# Altium PCB NewPowerandPlacePCB.PcbDoc
Units mm, origin at the board's own origin, x right, y up, seen from the top; angles counter-clockwise.
Board outline 89 x 123.55 mm, 4 copper layers (Top Layer, Internal Plane 1, Internal Plane 2, Bottom Layer); 78 components, 72 nets, 288 pads, 12 vias.
Unrouted connection lines stored in the file: 3.
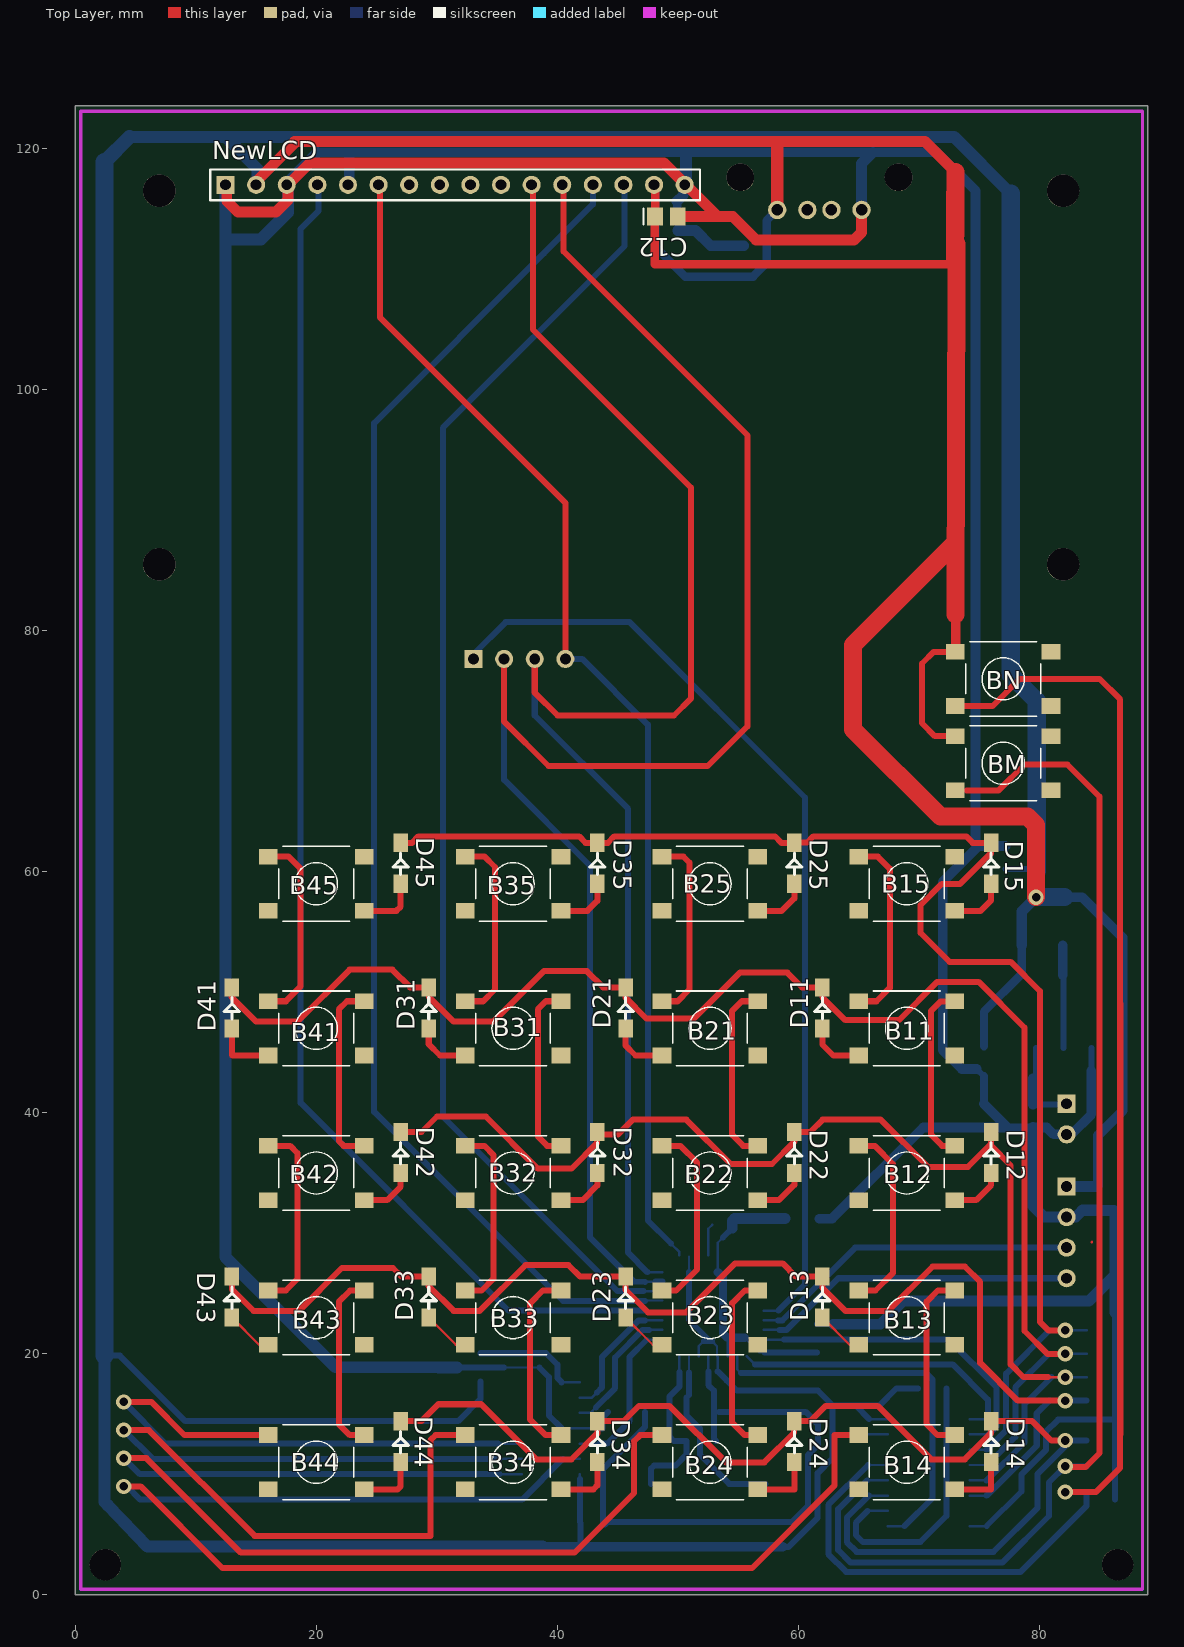
[diagram p0: Top Layer view]
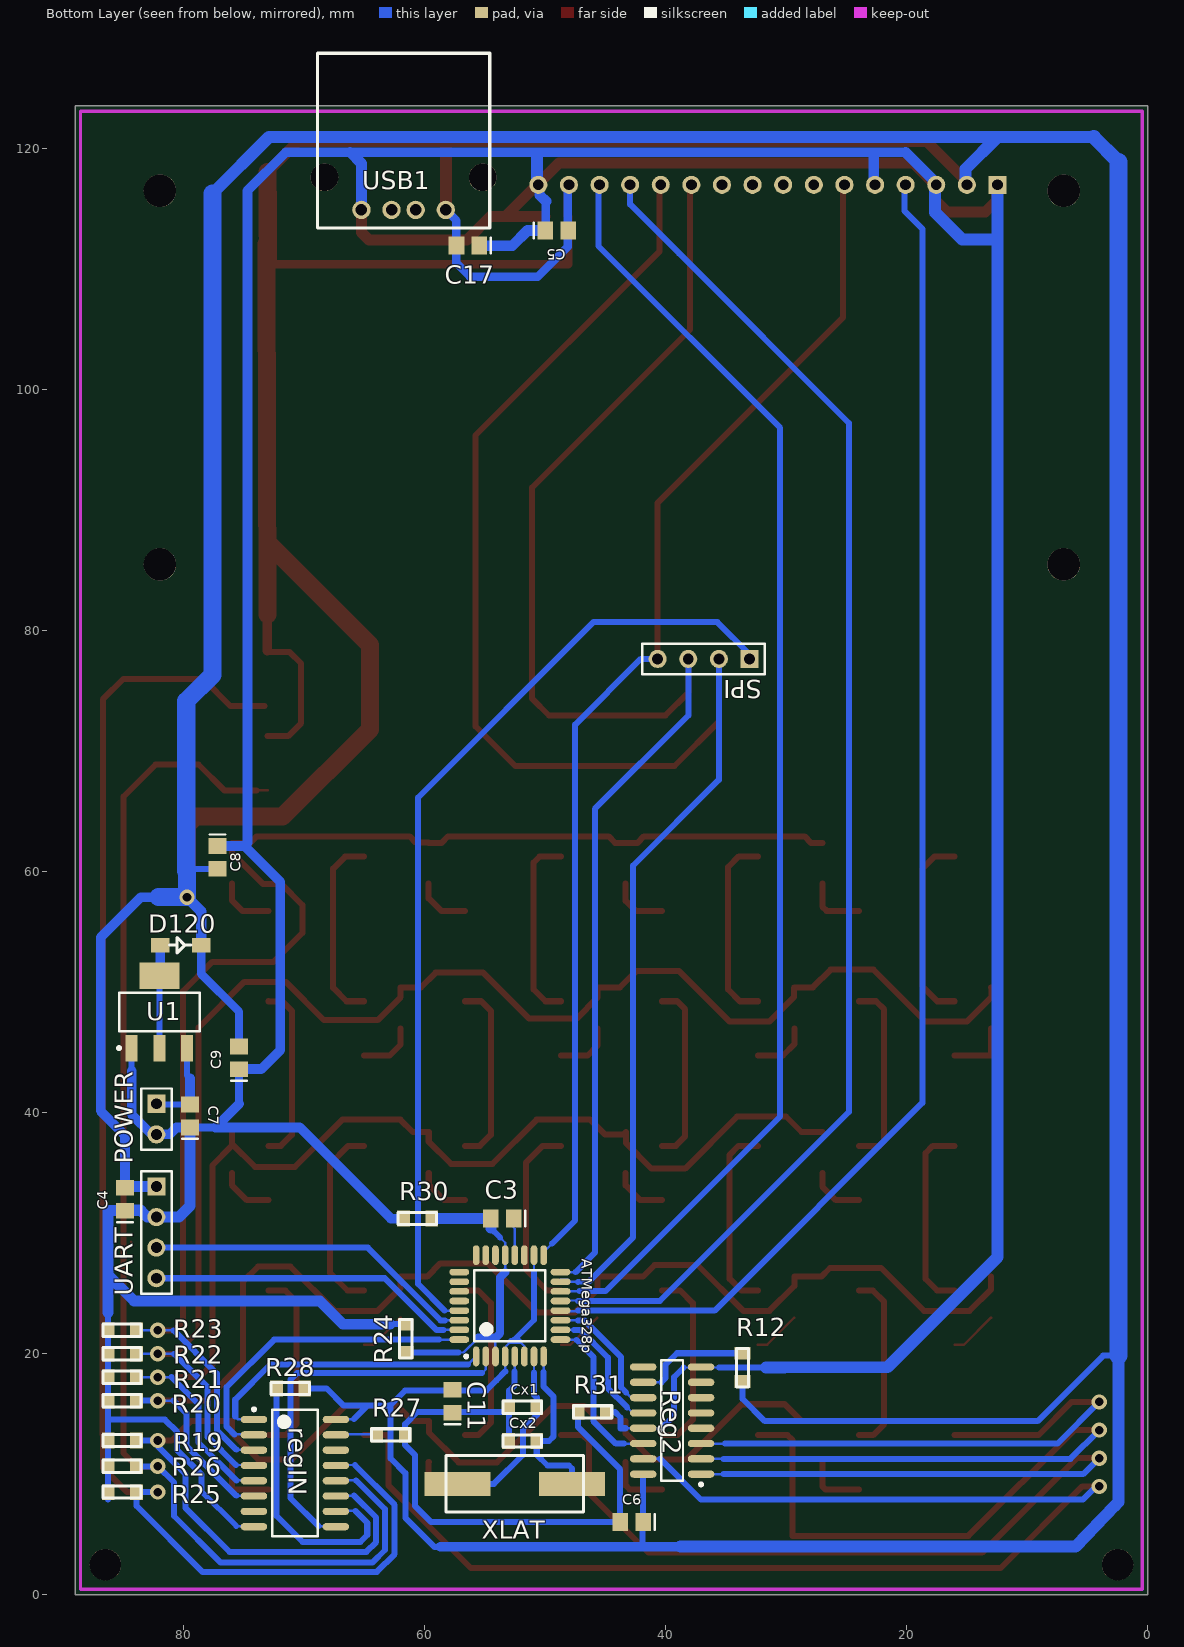
[diagram p1: Bottom Layer view, seen from below]
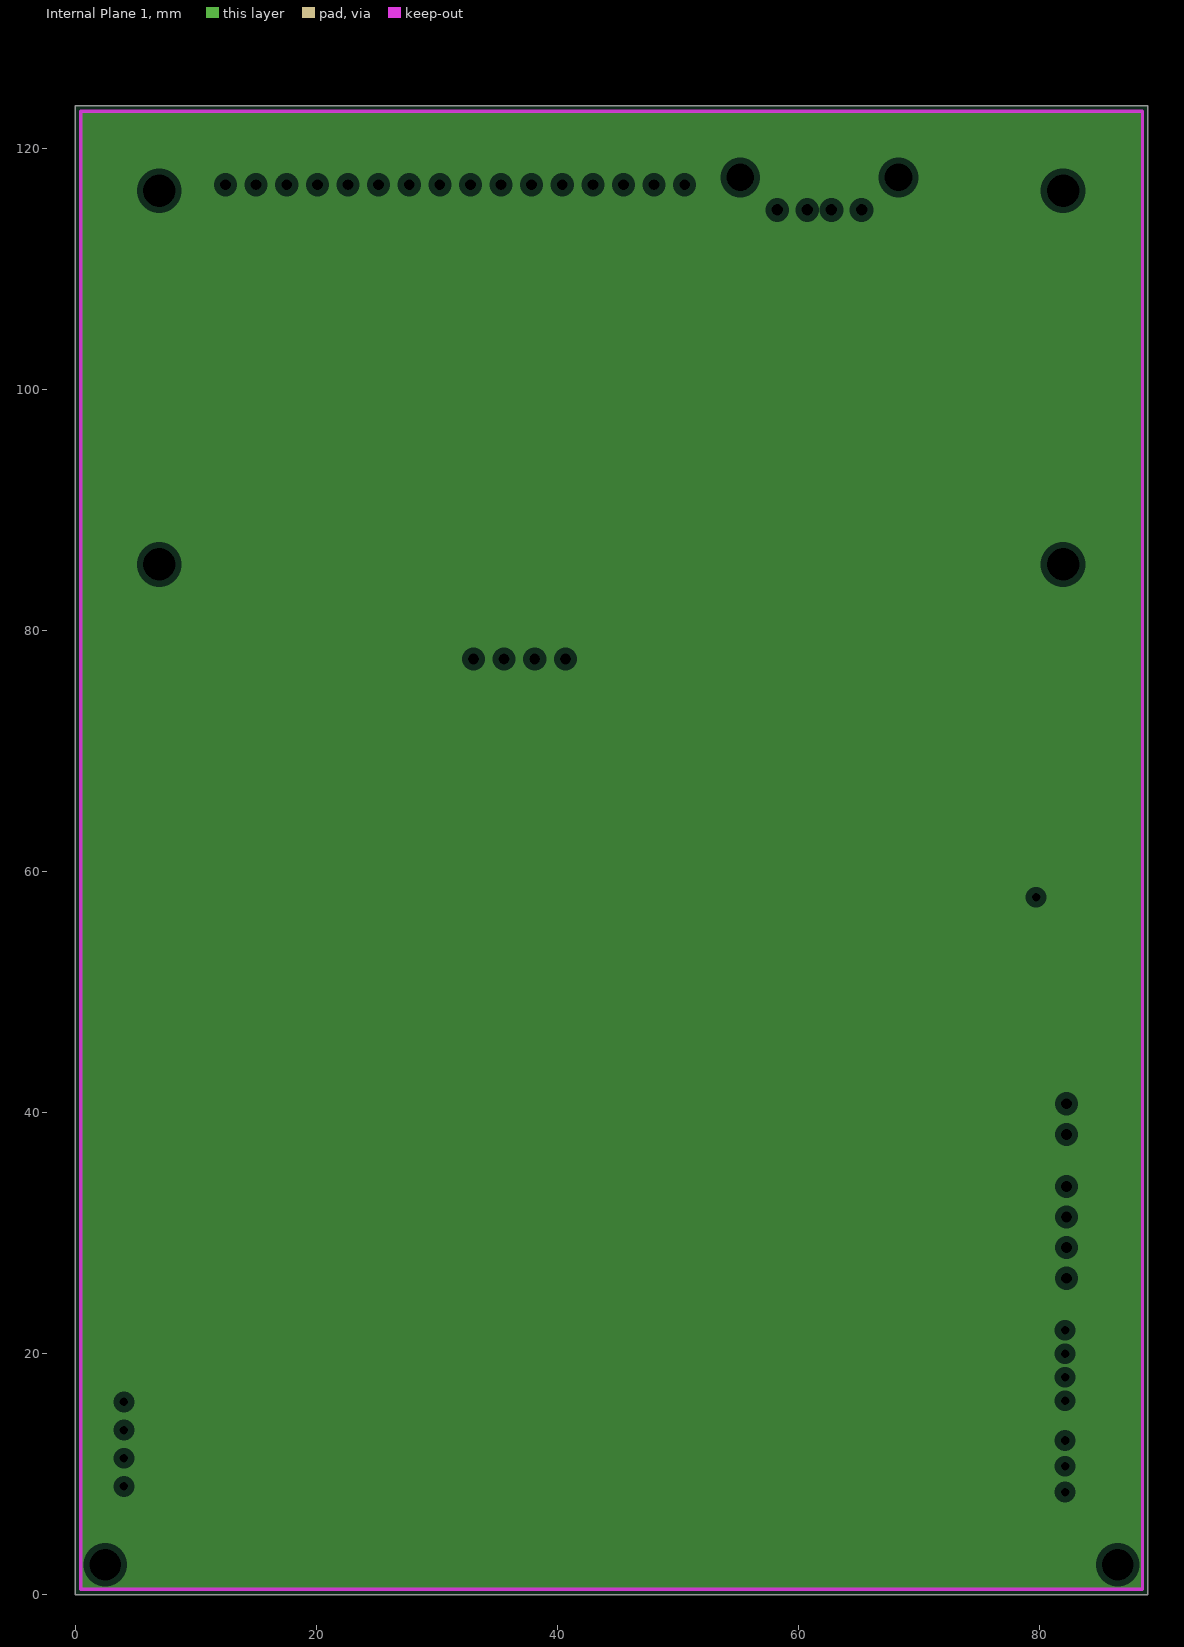
[diagram p2: Internal Plane 1, clearances drawn from the general rule]
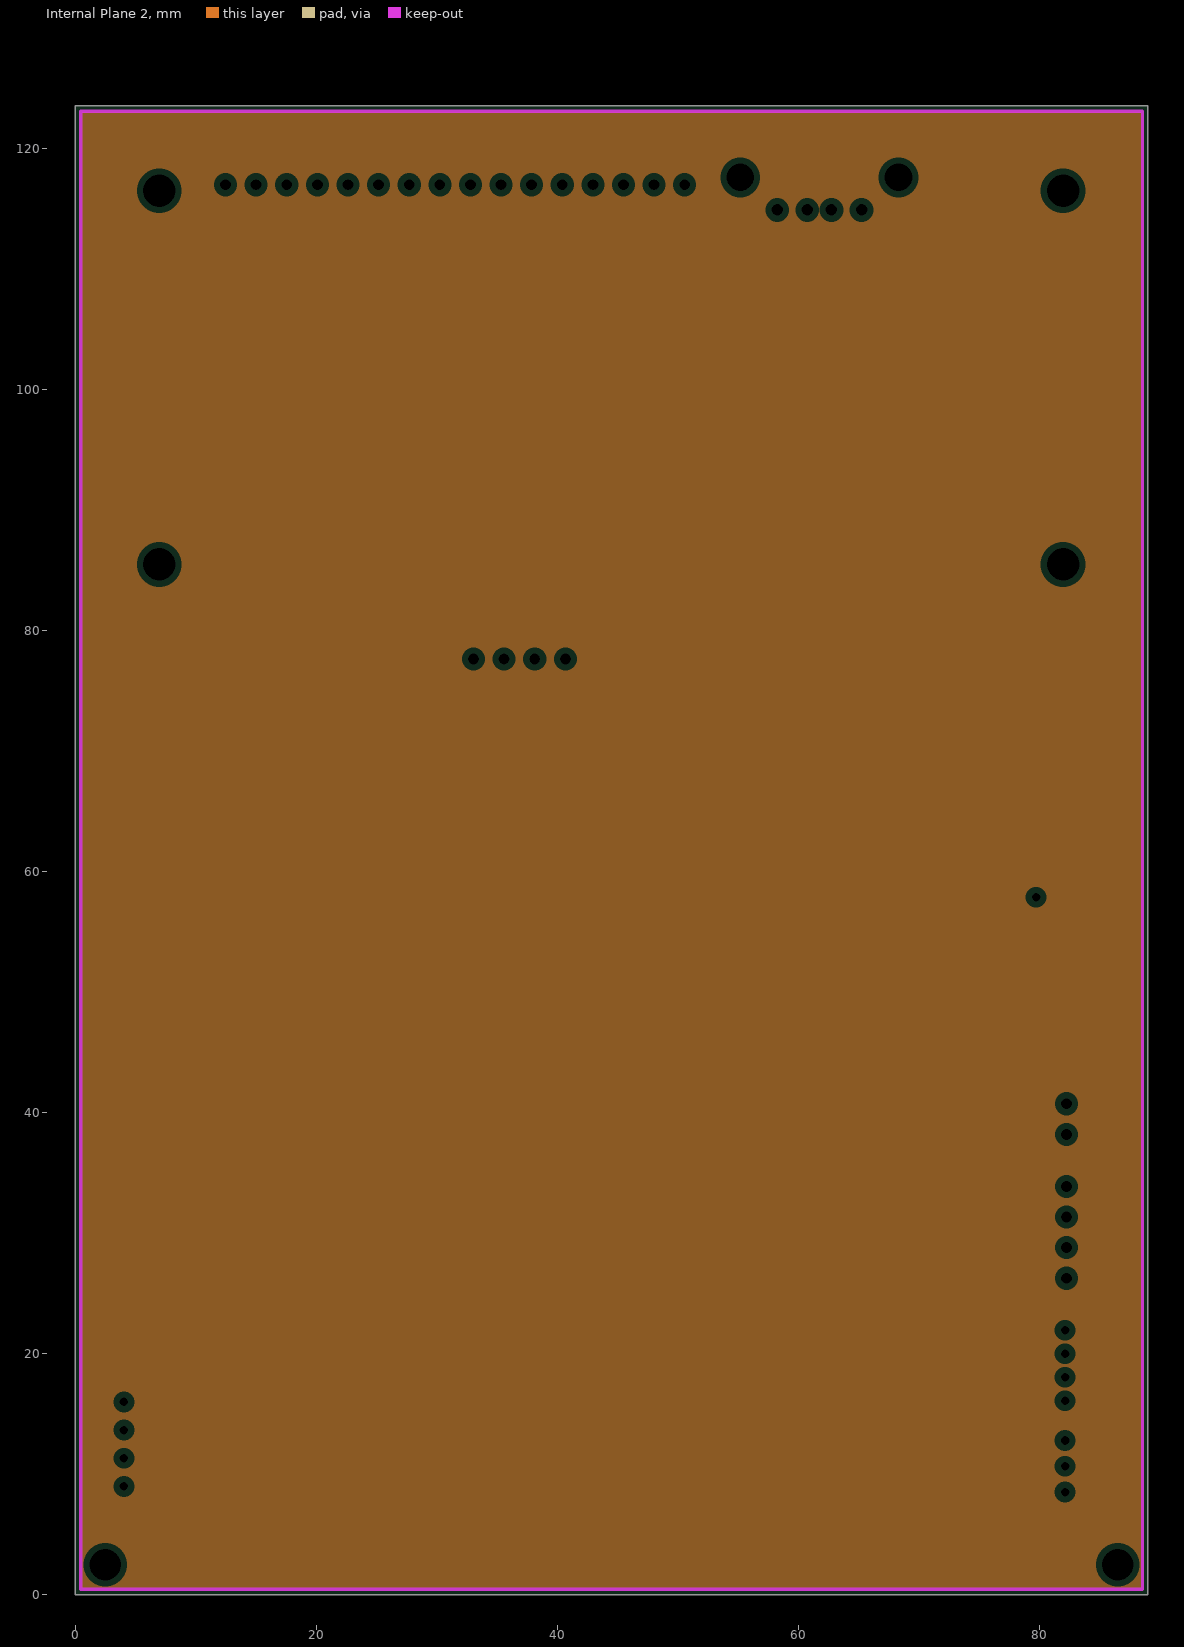
[diagram p3: Internal Plane 2, clearances drawn from the general rule]
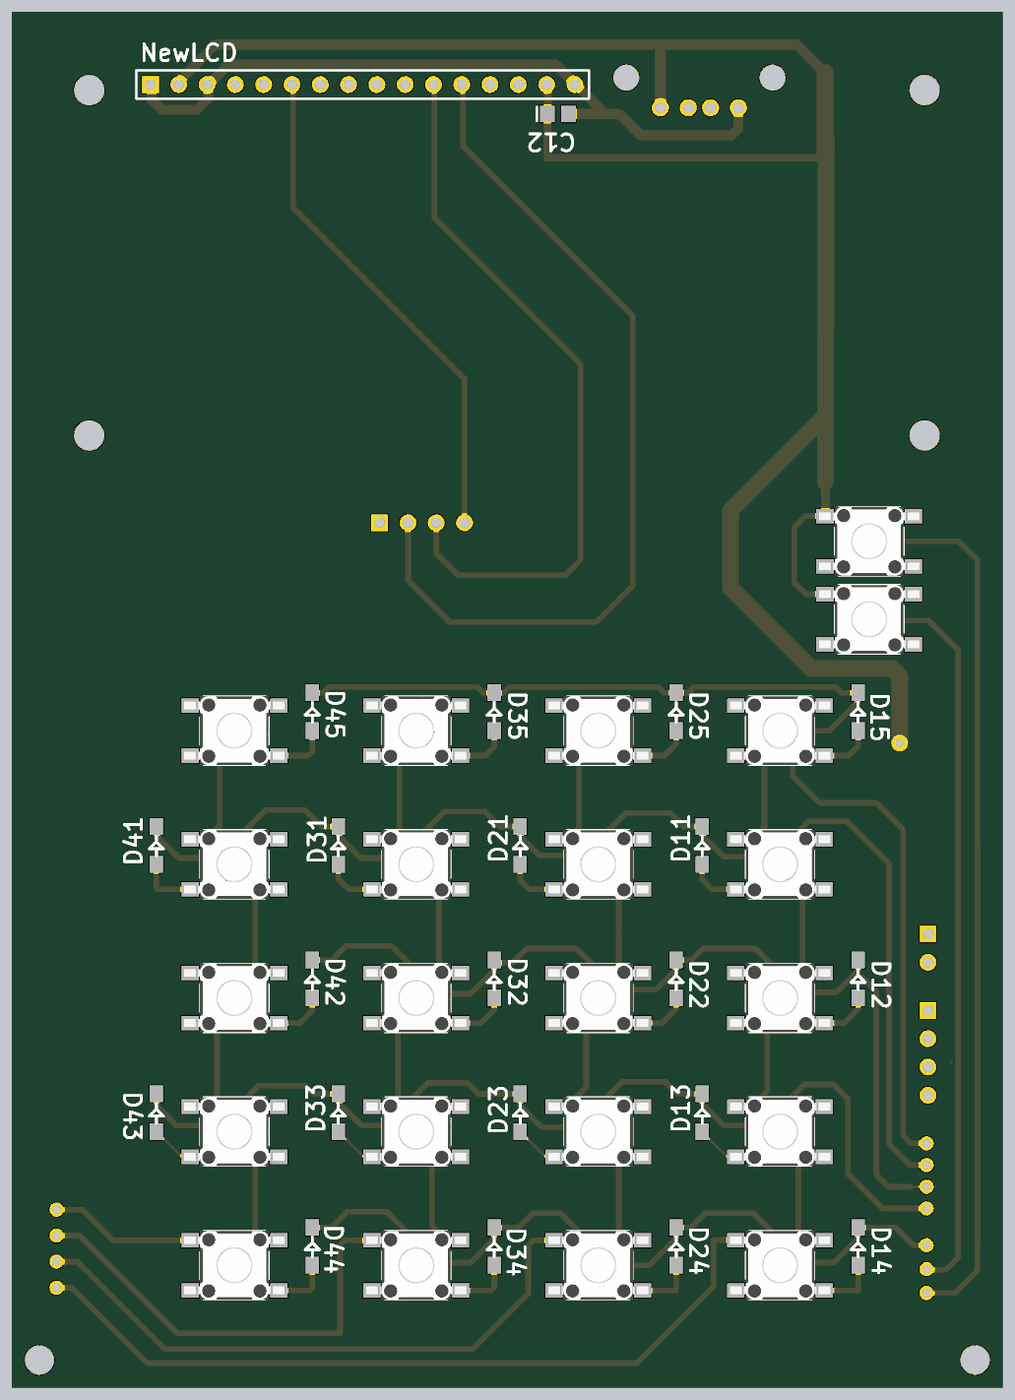
[diagram p4: 3D render of the assembled board from above, using the file's embedded part models]

## Layer stack, top to bottom
Top Solder: solder mask 0.0102, Solder Resist, Dk 3.5
Top Layer: signal copper 0.0356
Dielectric1: dielectric 0.32, FR-4, Dk 4.8
Internal Plane 1: plane copper 0.0356
Dielectric2: dielectric 0.32, FR-4, Dk 4.8
Internal Plane 2: plane copper 0.0356
Dielectric3: dielectric 0.32, FR-4, Dk 4.8
Bottom Layer: signal copper 0.0356
Bottom Solder: solder mask 0.0102, Solder Resist, Dk 3.5

## Board outline
-0.001,0.001 -0.001,123.546 23.27,123.546 46.962,123.546 88.999,123.546 88.999,0.001

## Design rules (kind name [scope] priority, off if disabled: settings)
Clearance [All] p1: gap=0.2
HoleSize [All] p1: absolutevalues=TRUE maxlimit=2.6 minlimit=0.025 maxpercent=80.000 minpercent=20.000
PlaneClearance [All] p1: clearance=0.508
PlaneConnect [All] p1: planeconnectstyle=Relief reliefexpansion=0.508 reliefentries=4 reliefconductorwidth=0.254 reliefairgap=0.254
PolygonConnect [All] p1: connectstyle=Relief reliefconductorwidth=0.254 reliefentries=4 polygonreliefangle="90 Angle" airgapwidth=0.254
RoutingVias [All] p1: holewidth=0.6 width=1 viastyle="Through Hole" minholewidth=0.711 minwidth=1.27 maxholewidth=0.711 maxwidth=1.27
SilkToSolderMaskClearance SilkscreenOverComponentPads [IsPad] p1: minsilkscreentomaskgap=0.254 clearancetoexposedcopper=TRUE
SolderMaskExpansion [All] p1: expansion=0.102
Width [All] p1: maxlimit=32 minlimit=0.2 preferedwidth=0.2 minimp=50.000000 maximp=50.000000 favimp=50.000000
26 further rules are at their usual default settings.

## Components (designator, comment, footprint, x,y, rotation, side; value= is the part's Value field where it differs from the comment)
ATMega328p "ATmega328P-AU" 32A_N 52.931,23.978 r90 bottom
B11 "TS6604" 430182070816 68.999,47.001 r180 top
B12 "TS6604" 430182070816 68.999,35.001 r180 top
B13 "TS6604" 430182070816 68.999,23.001 r180 top
B14 "TS6604" 430182070816 68.999,11.001 r180 top
B15 "TS6604" 430182070816 68.999,59.001 r180 top
B21 "TS6604" 430182070816 52.669,47.001 r180 top
B22 "TS6604" 430182070816 52.669,35.001 r180 top
B23 "TS6604" 430182070816 52.669,23.001 r180 top
B24 "TS6604" 430182070816 52.669,11.001 r180 top
B25 "TS6604" 430182070816 52.669,59.001 r180 top
B31 "TS6604" 430182070816 36.329,47.001 r180 top
B32 "TS6604" 430182070816 36.329,35.001 r180 top
B33 "TS6604" 430182070816 36.329,23.001 r180 top
B34 "TS6604" 430182070816 36.329,11.001 r180 top
B35 "TS6604" 430182070816 36.329,59.001 r180 top
B41 "TS6604" 430182070816 19.999,47.001 r180 top
B42 "TS6604" 430182070816 19.999,35.001 r180 top
B43 "TS6604" 430182070816 19.999,23.001 r180 top
B44 "TS6604" 430182070816 19.999,11.001 r180 top
B45 "TS6604" 430182070816 19.999,59.001 r180 top
BM "TS6604" 430182070816 76.999,69.001 r180 top
BN "TS6604" 430182070816 76.999,76.001 r180 top
C3 "0.1 uF" 0805 53.566,31.217 r0 bottom
C11 "4.7 uF" 0805 57.687,16.064 r90 bottom
C12 "4.7 uF" 0805 49.051,114.362 r0 top
C17 "10 uF" 0805 56.417,111.949 r0 bottom
D11 "1N4148WS" sod323 61.999,47.001 r90 top
D12 "1N4148WS" sod323 75.999,35.001 r90 top
D13 "1N4148WS" sod323 61.999,23.001 r90 top
D14 "1N4148WS" sod323 75.999,11.001 r90 top
D15 "1N4148WS" sod323 75.999,59.001 r90 top
D21 "1N4148WS" sod323 45.666,47.001 r90 top
D22 "1N4148WS" sod323 59.666,35.001 r90 top
D23 "1N4148WS" sod323 45.666,23.001 r90 top
D24 "1N4148WS" sod323 59.666,11.001 r90 top
D25 "1N4148WS" sod323 59.669,59.001 r90 top
D31 "1N4148WS" sod323 29.332,47.001 r90 top
D32 "1N4148WS" sod323 43.332,35.001 r90 top
D33 "1N4148WS" sod323 29.332,23.001 r90 top
D34 "1N4148WS" sod323 43.332,11.001 r90 top
D35 "1N4148WS" sod323 43.329,59.001 r90 top
D41 "1N4148WS" sod323 12.999,47.001 r90 top
D42 "1N4148WS" sod323 26.999,35.001 r90 top
D43 "1N4148WS" sod323 12.999,23.001 r90 top
D44 "1N4148WS" sod323 26.999,11.001 r90 top
D45 "1N4148WS" sod323 26.999,59.001 r90 top
D120 "1N4148WS" sod323 81.944,53.91 r180 bottom
NewLCD "Header 16" HDR1X16 12.472,117.001 r0 top
POWER "DS1021" HDR1X2 82.268,40.742 r270 bottom
R12 "100k" res_0805 33.627,20.041 r270 bottom
R19 "100k" res_0805 83.919,12.802 r0 bottom
R20 "100k" res_0805 83.919,16.104 r0 bottom
R21 "100k" res_0805 83.919,18.051 r0 bottom
R22 "100k" res_0805 83.919,19.999 r0 bottom
R23 "100k" res_0805 83.919,21.946 r0 bottom
R24 "0u" res_0805 61.567,22.454 r270 bottom
R25 "100k" res_0805 83.919,8.52 r0 bottom
R26 "100k" res_0805 83.919,10.661 r0 bottom
R27 "100k" res_0805 61.624,13.27 r0 bottom
R28 "100k" res_0805 69.949,17.12 r0 bottom
R30 "0u" res_0805 59.408,31.217 r0 bottom
R31 "0u" res_0805 47.273,15.175 r180 bottom
Reg2 "MC74HC595AD" 751B-05_N 39.469,14.453 r0 bottom
regIN "HD74HC165FP" PRSP0016DH-B_N 70.768,10.095 r180 bottom
SPI "DS1021" HDR1X4 33.049,77.659 r0 bottom
U1 "HT1117-50_SOT223" SOT223_N 82.014,48.362 r90 bottom
UART "DS1021" HDR1X4 82.268,33.884 r270 bottom
USB1 "usb connector type A" USB_connecter_T_A 61.751,116.267 r180 bottom
XLAT "M49-16.000-18- 30/50/-40+85" cristal 47.781,9.206 r0 bottom
С4 "10 uF" 0805 84.865,32.828 r90 bottom
С5 "4.7 uF" 0805 49.051,113.219 r180 bottom
С6 "4.7 uF" 0805 42.828,6.031 r0 bottom
С7 "10 uF" 0805 79.474,39.726 r90 bottom
С8 "4.7 uF" 0805 77.188,61.189 r270 bottom
С9 "4.7 uF" 0805 75.41,44.552 r90 bottom
Сx1 "22 pF" res_0805 50.702,15.556 r0 bottom
Сx2 "22 pF" res_0805 50.702,12.762 r0 bottom

## Footprints (in the part's own frame and the unit in brackets; to place one, negate y for a bottom-side part, rotate by r counter-clockwise, add the part's x,y. Pads: shape width x height; smd on the part's side, far side on the other; paste and mask are expansions set on the pad)
32A_N [mm] "Thin QFP, 32-Leads, Body 7x7mm, Pitch 0.8mm, IPC Medium Density"
  oval 1.65x0.55 smd: 1(-4.2,2.8) 2(-4.2,2) 3(-4.2,1.2) 4(-4.2,0.4) 5(-4.2,-0.4) 6(-4.2,-1.2) 7(-4.2,-2) 8(-4.2,-2.8) 17(4.2,-2.8) 18(4.2,-2) 19(4.2,-1.2) 20(4.2,-0.4) 21(4.2,0.4) 22(4.2,1.2) 23(4.2,2) 24(4.2,2.8)
  oval 0.55x1.65 smd: 9(-2.8,-4.2) 10(-2,-4.2) 11(-1.2,-4.2) 12(-0.4,-4.2) 13(0.4,-4.2) 14(1.2,-4.2) 15(2,-4.2) 16(2.8,-4.2) 25(2.8,4.2) 26(2,4.2) 27(1.2,4.2) 28(0.4,4.2) 29(-0.4,4.2) 30(-1.2,4.2) 31(-2,4.2) 32(-2.8,4.2)
  silkscreen extent -4.32,-2.95 2.95,3.75, body extent -3.5,-3.5 3.5,3.5, height 1.2
751B-05_N [mm] "SOIC, 16-Leads, Body 9.9x3.9mm, Pitch 1.27mm, IPC Medium Density"
  oval 2.2x0.6 smd: 1(-2.4,4.445) 2(-2.4,3.175) 3(-2.4,1.905) 4(-2.4,0.635) 5(-2.4,-0.635) 6(-2.4,-1.905) 7(-2.4,-3.175) 8(-2.4,-4.445) 9(2.4,-4.445) 10(2.4,-3.175) 11(2.4,-1.905) 12(2.4,-0.635) 13(2.4,0.635) 14(2.4,1.905) 15(2.4,3.175) 16(2.4,4.445)
  silkscreen extent -2.52,-5 0.9,5.42, body extent -2,-5 2,5, height 1.75
0805 [mm] "Chip Capacitor; Body 2.0 x 1.2 mm (LxW typ)"
  rect 1.3x1.5 smd: 1(-0.95,0) 2(0.95,0)
  silkscreen extent -1.9,-0.65 -1.9,0.65
430182070816 [mm] "6*6mm vertical type, SMD, height 7.0mm, black actuator, 160gf, T&R"
  rect 1.55x1.3 smd: 1(-3.975,2.25) 2(-3.975,-2.25) 3(3.975,2.25) 4(3.975,-2.25)
  silkscreen extent -3.1,-3.1 3.1,3.1, body extent -4.5,-3.1 4.5,3.1, height 7
cristal [mm]
  rect 5.5x2 smd: 0(0,0) 1(9.5,0)
  silkscreen extent -0.95,-2.35 10.45,2.35
HDR1X2 [mm] "Connector; Header; 2 Position"
  rect 1.5x1.5 hole 0.9: 1(0,0)
  round 1.5 hole 0.9: 2(2.54,0)
  silkscreen extent -1.27,-1.27 3.81,1.27
HDR1X4 [mm] "Connector; Header; 4 Position"
  rect 1.5x1.5 hole 0.9: 1(0,0)
  round 1.5 hole 0.9: 2(2.54,0) 3(5.08,0) 4(7.62,0)
  silkscreen extent -1.27,-1.27 8.89,1.27
HDR1X16 [mm] "Connector; Header; 16 Position"
  rect 1.5x1.5 hole 0.9: 1(0,0)
  round 1.5 hole 0.9: 2(2.54,0) 3(5.08,0) 4(7.62,0) 5(10.16,0) 6(12.7,0) 7(15.24,0) 8(17.78,0) 9(20.32,0) 10(22.86,0) 11(25.4,0) 12(27.94,0) 13(30.48,0) 14(33.02,0) 15(35.56,0) 16(38.1,0)
  silkscreen extent -1.27,-1.27 39.37,1.27
PRSP0016DH-B_N [mm] "SOP, 16-Leads, Body 10.06x5.5mm, Pitch 1.27mm, IPC Medium Density"
  oval 2.2x0.6 smd: 1(-3.4,4.445) 2(-3.4,3.175) 3(-3.4,1.905) 4(-3.4,0.635) 5(-3.4,-0.635) 6(-3.4,-1.905) 7(-3.4,-3.175) 8(-3.4,-4.445) 9(3.4,-4.445) 10(3.4,-3.175) 11(3.4,-1.905) 12(3.4,-0.635) 13(3.4,0.635) 14(3.4,1.905) 15(3.4,3.175) 16(3.4,4.445)
  silkscreen extent -3.52,-5.25 1.9,5.42, body extent -2.7,-5.25 2.7,5.25, height 2.2
res_0805 [mm]
  rect 1.05x1.3 smd: 0(0,0) 1(2.35,0)
  silkscreen extent -0.38,-0.51 2.79,0.51
sod323 [mm]
  rect 1.5x1.2 smd: 0(0,0) 1(3.4,0)
  silkscreen extent 0.76,-0.63 2.54,0.64
SOT223_N [mm] "SOT223, 4-Leads, Body 6.5x3.5mm, Pitch 2.3mm, Lead Span 7mm, IPC Medium Density"
  rect 2.2x1 smd: 1(-3,2.3) 2(-3,0) 3(-3,-2.3)
  rect 2.2x3.3 smd: 4(3,0)
  silkscreen extent -3.12,-3.35 1.6,3.48, body extent -1.85,-3.35 1.85,3.35, height 1.8
USB_connecter_T_A [mm] "USB1"
  round 1.524 hole 0.95: 1(3.5,-1.35) 2(1,-1.35) 3(-1,-1.35) 4(-3.5,-1.35)
  round 2.3 hole 2.3: ""(-6.57,1.35) ""(6.57,1.35)
  silkscreen extent -7.15,-2.85 7.15,11.65

## Part data
ATMega328p: "8-bit AVR Microcontroller, 32KB Flash, 1KB EEPROM, 2KB SRAM, 32-pin TQFP, Industrial Grade (-40°C to 85°C)"
B11 B12 B13 B14 B15 B21 B22 B23 B24 B25 B31 B32 B33 B34 B35 B41 B42 B43 B44 B45 BM BN: library part 430182070816, "WS-TASV SMD Tact Switch 6X6 mm"
C3 C11 C12 C17 С4 С5 С6 С7 С8 С9 Сx1 Сx2: library part C0805, "Ceramic Chip Capacitor - Standard"
D11 D12 D13 D14 D15 D21 D22 D23 D24 D25 D31 D32 D33 D34 D35 D41 D42 D43 D44 D45 D120: library part SOD323
NewLCD: "Header, 16-Pin"
POWER: library part "Header 2", "Header, 2-Pin"
R12 R19 R20 R21 R22 R23 R24 R25 R26 R27 R28 R30 R31: library part res_0805
Reg2: "8-Bit Serial-Input/Serial or Prallel-Output Shift Register with Latched 3-State Outputs"
regIN: "Parallel-Load 8-bit Shift Register"
SPI UART: library part "Header 4", "Header, 4-Pin"
U1: "5.0V, 1A General Purpose LDO"
XLAT: library part cristal_smd

## Free pads (board coordinates)
  round 2.6 hole 2.6: 11(2.499,2.501) 13(86.499,2.501)
  round 2.7 hole 2.7: 15(6.972,85.501) 16(81.972,85.501) 17(6.972,116.501) 18(81.972,116.501)

## Via types
v1: diameter 1.27, hole 0.711, Top Layer to Bottom Layer, 12 vias

## Nets (pads, with @x,y where several pads share a name; then routed paths per layer and width w, separated by ;. In a path a pad name is that pad's centre, name@x,y a point inside that pad or via, vN(x,y) a via of type N, cw(c..) or ccw(c..) an arc to the next point about the centre after c; other vN are vias at no path point)
GND: ATMega328p.3 ATMega328p.5 ATMega328p.21 C3.2 C11.1 C12.2 C17.1 NewLCD.1 NewLCD.3 NewLCD.5 NewLCD.16 POWER.2 R19.1 R20.1 R21.1 R22.1 R23.1 R24.0 R24.1 R25.1 R26.1 R27.0 R30.0 R30.1 R31.0 R31.1 Reg2.8 Reg2.13 regIN.8 U1.1 UART.2 USB1.4 С4.1 С5.1 С6.2 С7.1 С8.1 С9.1 Сx1.1 Сx2.1 | length 557.5
  Top Layer w0.9: NewLCD.1@12.572,117.001 12.572,115.662 13.491,114.743 16.666,114.743 17.652,115.729 17.652,117.001 19.458,118.807 48.866,118.807 53.311,114.362 ; C12.2 53.311,114.362 ; USB1.4 65.251,113.046 64.63,112.425 56.502,112.425 54.565,114.362 53.311,114.362
  Bottom Layer w0.2: 35.589,18.858 38.51,18.858 ; 40.358,13.818 Reg2.13 43.336,13.818 ; ATMega328p.5 52.539,19.77 52.539,18.508 ; 53.312,26.772 53.312,29.215 53.75,29.653 ; ATMega328p.3 54.131,21.311 ; 55.561,21.311 56.768,20.104 57.179,20.104 ; regIN.8@74.238,5.69 75.634,5.69
  Bottom Layer w0.45: 75.634,5.69 78.515,8.571
  Bottom Layer w0.5: NewLCD.1@12.451,116.88 12.572,117.001 NewLCD.1@12.475,117.098 ; NewLCD.5@22.351,117.001 NewLCD.5@22.732,117.001 ; 31.665,18.858 35.589,18.858 ; 38.51,18.858 39.3,18.068 39.3,14.876 40.358,13.818 ; 43.336,13.818 43.757,13.818 43.757,14.707 44.225,15.175 ; С6.2 43.778,10.41 47.273,13.905 R31.0 ; С6.2@43.975,5.834 44.172,6.031 59.465,6.031 60.795,7.361 60.795,11.584 61.624,12.413 R27.0 61.624,14.159 60.608,15.175 Сx1.1@53.433,15.175 ; 50.448,116.14 50.448,116.272 50.672,116.496 NewLCD.16@50.672,117.001 ; 52.539,18.508 52.539,17.402 52.988,16.953 52.988,12.953 Сx2.1@53.179,12.762 ; 53.75,29.653 54.512,30.415 ; C3.2@54.512,31.02 C3.2@54.709,31.217 ; 57.179,20.104 R24.1 ; R24.0 62.894,22.454 ; 74.705,62.397 74.963,62.139 ; С9.1@74.815,43.623 С9.1@75.41,43.028 ; 78.515,8.571 78.515,9.968 80.547,12 80.547,13.524 81.563,14.54 86.262,14.54 ; 83.341,31.664 С4.1@84.865,31.664 ; 84.314,43.496 U1.1 ; R25.1@86.269,7.913 R25.1 R26.1 R19.1 R20.1 R21.1 R22.1 R23.1 86.269,23.43
  Bottom Layer w0.7: С5.1@49.94,113.854 49.94,115.632 ; 53.312,26.772 53.75,26.334 53.75,21.692 54.131,21.311 55.561,21.311 ; 75.41,40.742 С9.1@75.41,43.028 ; 77.376,38.776 С7.1
  Bottom Layer w0.8: 20.095,119.696 66.186,119.696 71.53,119.696 74.705,116.521 74.705,62.397 ; R30.1 62.807,31.217 70.366,38.776 77.376,38.776 75.41,40.742 ; С9.1@74.815,43.623 73.562,43.623 71.981,45.204 71.981,59.157 74.963,62.139 С8.1 ; С7.1 80.608,38.776 81.182,38.202 POWER.2 82.649,38.202 84.314,39.867 84.314,43.496
  Bottom Layer w0.9: NewLCD.3@17.652,117.001 17.652,117.253 20.095,119.696 ; NewLCD.5@22.732,117.001 22.732,119.315 ; 49.94,115.632 50.448,116.14 ; С5.1 51.464,113.219 52.734,111.949 C17.1 ; 54.512,30.415 C3.2@54.512,31.02 ; C3.2@54.709,31.217 R30.0@58.9,31.217 ; 62.894,22.454 66.793,22.454 68.705,24.366 84.11,24.366 86.269,26.525 ; USB1.4 65.251,118.761 66.186,119.696 ; С7.1 79.474,32.25 80.38,31.344 UART.2 83.021,31.344 83.341,31.664 83.595,31.918 84.825,31.918 С4.1 86.196,31.878 86.269,31.805 86.269,26.525 ; 86.269,23.43 86.269,26.525
  Bottom Layer w1: NewLCD.1@12.451,116.88 12.451,112.457 ; NewLCD.3@17.652,117.001 17.652,114.713 15.396,112.457 12.451,112.457 ; 31.665,18.858 30.128,18.858 21.579,18.898 12.451,28.026 12.451,112.457 ; NewLCD.16@50.672,117.001 50.672,119.315
NetATMega328p_1: ATMega328p.1 regIN.1 | length 24.4
  Bottom Layer w0.2: ATMega328p.1 56.397,19.112 ; regIN.1@74.238,14.58 75.507,14.58 75.721,14.794
  Bottom Layer w0.5: 56.397,19.112 72.8,19.112 75.721,16.191 75.721,14.794
NetATMega328p_2: ATMega328p.2 regIN.9 | length 32.1
  Bottom Layer w0.2: ATMega328p.2 54.931,18.693 55.234,18.39 ; regIN.9@67.438,5.69 68.806,5.69
  Bottom Layer w0.5: 55.234,18.39 70.601,18.39 71.149,17.842 71.149,8.033 68.806,5.69
NetATMega328p_4: ATMega328p.4 ATMega328p.6 ATMega328p.18 BM.4 BN.4 C11.2 C12.1 C17.2 D120.1 NewLCD.2 NewLCD.15 R12.1 R28.0 Reg2.16 regIN.16 UART.1 USB1.1 С4.2 С5.2 С6.1 С8.2 С9.2 | length 670.8
  Top Layer w0.5: C12.1 C12.1@48.132,114.393 ; 58.251,120.556 58.28,120.585 ; BM.4 71.334,71.251 70.26,72.325 70.26,77.278 71.233,78.251 BN.4
  Top Layer w0.7: C12.1 48.101,110.425 73.011,110.425 ; C12.1@48.132,114.393 NewLCD.15@48.132,117.001
  Top Layer w0.8: NewLCD.2@15.112,117.001 NewLCD.2@15.112,117.38 ; BN.4@73.054,78.348 73.054,81.342 73.054,87.311
  Top Layer w0.9: NewLCD.2@15.112,117.38 18.253,120.521 ; 18.19,120.585 58.28,120.585 70.514,120.585 73.034,118.065
  Top Layer w1: USB1.1 58.251,120.556
  Top Layer w1.5: 73.011,110.425 73.024,114.917 73.034,118.065 ; 73.054,81.342 73.134,110.425 73.139,112.076 ; 73.054,87.311 64.545,78.802 64.545,71.817 71.784,64.578 79.023,64.578 79.728,63.873 v1(79.728,57.887)
  Bottom Layer w0.2: 41.869,9.587 Reg2.16 ; 50.931,26.772 ATMega328p.18@50.931,28.051 ; ATMega328p.6 51.731,20.619 52.165,21.053 ; 52.831,21.053 53.256,20.628 ATMega328p.4@53.256,19.778 ; 53.312,18.534 ATMega328p.4@53.312,19.759 ; 65.885,14.58 regIN.16@67.438,14.58
  Bottom Layer w0.5: 2.349,19.84 2.442,19.747 ; 2.442,7.682 2.696,7.428 ; 2.442,19.84 3.708,19.84 9.135,14.413 31.779,14.413 33.627,16.261 R12.1 ; 41.869,9.587 41.869,8.598 41.878,8.589 С6.1 41.939,5.97 41.939,3.981 ; 48.132,111.852 48.225,111.758 ; 50.931,26.772 50.931,22.803 52.55,21.184 ; 52.165,21.053 52.831,21.053 ; 53.312,18.534 54.046,17.8 54.893,16.953 61.624,16.953 62.837,15.74 62.837,11.322 61.599,10.084 61.599,6.387 59.193,3.981 58.693,3.981 ; 62.964,15.723 66.744,15.723 68.141,17.12 R28.0 ; 64.742,15.723 65.885,14.58 ; С8.2 79.622,60.239 79.785,60.076
  Bottom Layer w0.7: 48.132,111.852 NewLCD.15@48.132,117.001 ; 48.225,111.758 50.607,109.377 56.248,109.377 57.367,110.496 C17.2 57.367,114.033 USB1.1 ; С9.2 75.41,48.392 78.544,51.526 D120.1
  Bottom Layer w0.8: 38.76,3.999 41.939,3.999 ; 41.939,3.981 58.693,3.981 ; 82.071,57.887 83.555,57.887 86.897,54.545 86.897,40.154 84.865,38.122 84.865,33.99 С4.2@84.759,33.884
  Bottom Layer w0.9: D120.1 78.544,56.703 v1(79.728,57.887) ; UART.1 С4.2@84.759,33.884
  Bottom Layer w1: 2.442,7.682 2.442,19.747 ; 2.696,7.428 5.998,3.999 38.76,3.999 ; 4.5,120.966 12.475,120.966 ; NewLCD.2@15.112,117.001 15.112,118.329 12.475,120.966 ; 77.626,116.267 72.927,120.966 12.475,120.966
  Bottom Layer w1.2: 2.442,118.908 4.5,120.966
  Bottom Layer w1.5: 2.442,19.84 2.442,118.908 ; 77.626,116.267 77.626,76.33 79.785,74.171 79.785,60.076 ; 79.728,60.133 v1(79.728,57.887) 82.071,57.887
NetATMega328p_7: ATMega328p.7 XLAT.1 Сx1.0 | length 14.8
  Bottom Layer w0.2: 50.931,18.452 ATMega328p.7
  Bottom Layer w0.5: 50.702,16.368 Сx1.0 50.702,14.921 51.845,13.778 51.845,11.619 54.258,9.206 XLAT.1 ; 50.931,16.597 50.931,18.452
NetATMega328p_8: ATMega328p.8 XLAT.0 Сx2.0 | length 14.3
  Bottom Layer w0.2: ATMega328p.8 50.134,18.477
  Bottom Layer w0.5: XLAT.0 47.781,10.476 48.035,10.73 49.813,10.73 50.702,11.619 Сx2.0 49.686,12.762 49.305,13.143 49.305,16.445 50.134,17.274 50.134,18.477
NetATMega328p_9: ATMega328p.9 Reg2.14 | length 13.3
  Bottom Layer w0.2: Reg2.14 43.463,12.548 ; 47.654,21.178 ATMega328p.9
  Bottom Layer w0.5: 43.463,12.548 44.138,12.548 46.003,14.413 46.003,19.747 47.4,21.144
NetATMega328p_10: ATMega328p.10 Reg2.12 | length 11.2
  Bottom Layer w0.2: Reg2.12 42.741,15.088 43.209,15.556 ; 47.599,21.978 ATMega328p.10
  Bottom Layer w0.5: 43.209,15.556 44.803,17.15 44.803,19.69 47.091,21.978 47.599,21.978
NetATMega328p_11: ATMega328p.11 Reg2.11 | length 11
  Bottom Layer w0.2: Reg2.11 42.868,16.358 43.292,16.782 ; 47.273,22.778 ATMega328p.11
  Bottom Layer w0.5: 43.292,16.782 43.717,17.207 43.717,19.747 46.748,22.778 47.273,22.778
NetATMega328p_12: ATMega328p.12 NewLCD.4 | length 114.1
  Bottom Layer w0.2: 46.922,23.527 ATMega328p.12@48.477,23.527
  Bottom Layer w0.5: NewLCD.4@20.192,117.001 20.192,114.84 18.698,113.346 18.698,40.829 35.949,23.578 47.273,23.578
NetATMega328p_13: ATMega328p.13 NewLCD.13 | length 114.5
  Bottom Layer w0.2: 47.176,24.416 ATMega328p.13@48.731,24.416
  Bottom Layer w0.5: NewLCD.13@42.955,116.521 42.955,115.379 38.891,111.314 24.794,97.217 24.794,89.789 24.794,80.707 24.794,40.067 40.483,24.378 47.273,24.378
NetATMega328p_14: ATMega328p.14 NewLCD.14 | length 107.8
  Bottom Layer w0.2: 47.146,25.208 47.176,25.178 ATMega328p.14
  Bottom Layer w0.5: NewLCD.14@45.592,117.001 45.592,111.919 30.509,96.836 30.509,39.686 44.987,25.208 47.146,25.208
NetATMega328p_15: ATMega328p.15 NewLCD.12 SPI.2 | length 137.4
  Top Layer w0.5: SPI.2 35.589,72.452 39.272,68.769 52.48,68.769 55.782,72.071 55.782,96.201 40.512,111.471 NewLCD.12@40.512,117.001
  Bottom Layer w0.2: 47.273,25.97 ATMega328p.15@48.142,25.978
  Bottom Layer w0.5: SPI.2@35.589,77.024 35.589,67.626 42.701,60.514 42.701,29.653 46.376,25.978 47.273,25.97 ; ATMega328p.15@48.142,25.978 ATMega328p.15
NetATMega328p_16: ATMega328p.16 NewLCD.11 SPI.3 | length 119.8
  Top Layer w0.5: NewLCD.11@37.972,117.001 37.972,104.994 51.083,91.883 51.083,74.357 49.686,72.96 40.034,72.96 38.129,74.865 38.129,76.897
  Bottom Layer w0.2: 47.481,26.778 ATMega328p.16
  Bottom Layer w0.5: SPI.3@38.129,77.024 38.129,72.96 45.876,65.213 45.876,28.383 47.481,26.778
NetATMega328p_17: ATMega328p.17 NewLCD.6 SPI.4 | length 99.9
  Top Layer w0.5: NewLCD.6@25.272,117.001 25.272,106.01 40.669,90.613 SPI.4
  Bottom Layer w0.2: 49.432,29.145 49.432,29.128 50.131,28.429 ATMega328p.17
  Bottom Layer w0.5: SPI.4 42.066,77.659 47.518,72.207 47.518,31.059 49.432,29.145
NetATMega328p_20: ATMega328p.20 C3.1 | length 2.7
  Bottom Layer w0.2: ATMega328p.20 52.531,30.37 C3.1@52.87,30.709
NetATMega328p_29: ATMega328p.29 SPI.1 | length 79.3
  Bottom Layer w0.2: ATMega328p.29 58.343,23.578
  Bottom Layer w0.5: SPI.1@33.049,78.04 35.716,80.707 46.003,80.707 60.551,66.159 60.551,25.786 58.343,23.578
NetATMega328p_30: ATMega328p.30 UART.3 | length 27.6
  Bottom Layer w0.2: ATMega328p.30 58.322,22.778
  Bottom Layer w0.5: 58.322,22.778 58.686,22.778 64.712,28.804 UART.3
NetATMega328p_31: ATMega328p.31 UART.4 | length 26.9
  Bottom Layer w0.2: ATMega328p.31 58.449,21.978
  Bottom Layer w0.5: 58.449,21.978 59.029,21.978 63.315,26.264 UART.4
NetATMega328p_32: ATMega328p.32 regIN.2 | length 26.7
  Bottom Layer w0.2: ATMega328p.32 58.83,21.178 ; regIN.2@74.238,13.31 75.791,13.31
  Bottom Layer w0.5: 58.83,21.178 72.495,21.178 76.45,17.223 76.45,15.429 76.45,13.991 ; 75.791,13.31 76.461,13.98
NetB11_2: B11.2 B12.2 | length 14.9
  Top Layer w0.5: B12.2 71.933,37.251 71.022,38.162 71.022,48.449 71.784,49.211 72.934,49.211 B11.2
NetB11_3: B11.3 D11.0 | length 4.7
  Top Layer w0.5: D11.0 61.999,45.661 62.909,44.751 B11.3
NetB11_4: B11.4 B15.4 | length 15.9
  Top Layer w0.5: B11.4 66.49,49.251 67.593,50.354 67.593,60.26 66.602,61.251 B15.4
NetB12_1: B12.1 D12.0 | length 4.5
  Top Layer w0.5: B12.1 74.755,32.751 75.999,33.995 D12.0
NetB12_4: B12.4 B13.4 | length 15.9
  Top Layer w0.5: B13.4 66.407,25.251 67.847,26.691 67.847,35.749 66.345,37.251 B12.4
NetB13_2: B13.2 B14.2 | length 15.6
  Top Layer w0.5: B14.2 71.549,13.251 70.641,14.159 70.641,24.319 71.573,25.251 B13.2
NetB13_3: B13.3 D13.0 | length 4
  Top Layer w0.2: D13.0 64.249,20.751 B13.3
NetB14_1: B14.1 D14.0 | length 5.3
  Top Layer w0.5: B14.1 75.999,8.751 D14.0
NetB14_4: B14.4 Reg2.15 | length 110.5
  Top Layer w0.5: v1(4.036,8.992) 5.432,8.992 ; 5.432,9.001 12.212,2.221 56.163,2.221 63.021,9.079 63.021,13.27 65.005,13.27 B14.4
  Bottom Layer w0.2: 40.455,11.278 Reg2.15
  Bottom Layer w0.5: v1(4.036,8.992) 4.29,8.992 5.382,7.9 37.077,7.9 40.455,11.278
NetB15_1: B15.1 D15.0 | length 4.8
  Top Layer w0.5: B15.1 75.133,56.751 75.999,57.617 D15.0
NetB21_2: B21.2 B22.2 | length 15.3
  Top Layer w0.5: B22.2 55.423,37.251 54.512,38.162 54.512,48.449 55.314,49.251 B21.2
NetB21_3: B21.3 D21.0 | length 4.8
  Top Layer w0.5: D21.0 45.666,45.572 46.486,44.751 B21.3
NetB21_4: B21.4 B25.4 | length 15.7
  Top Layer w0.5: B21.4 49.98,49.251 50.956,50.227 50.956,60.768 50.473,61.251 B25.4
NetB22_1: B22.1 D22.0 | length 4.5
  Top Layer w0.5: B22.1 58.392,32.751 59.666,34.024 D22.0
NetB22_4: B22.4 B23.4 | length 16
  Top Layer w0.5: B23.4 49.856,25.251 51.591,26.986 51.591,35.876 50.216,37.251 B22.4
NetB23_2: B23.2 B24.2 | length 15
  Top Layer w0.5: B24.2 55.547,13.251 54.512,14.286 54.512,24.192 55.571,25.251 B23.2
NetB23_3: B23.3 D23.0 | length 4
  Top Layer w0.2: D23.0 47.916,20.751 B23.3
NetB24_1: B24.1 D24.0 | length 5.3
  Top Layer w0.5: B24.1 59.666,8.751 D24.0
NetB24_4: B24.4 Reg2.1 | length 88.1
  Top Layer w0.5: v1(4.036,11.334) 5.902,11.334 13.745,3.491 41.431,3.491 46.384,8.444 46.384,12.762 46.873,13.251 B24.4
  Bottom Layer w0.2: 35.208,10.008 Reg2.1
  Bottom Layer w0.5: v1(4.036,11.334) 5.362,10.008 35.208,10.008
NetB25_1: B25.1 D25.0 | length 4.7
  Top Layer w0.5: B25.1 58.623,56.751 59.669,57.797 D25.0
NetB31_2: B31.2 B32.2 | length 15
  Top Layer w0.5: B32.2 39.167,37.251 38.383,38.035 38.383,48.576 39.058,49.251 B31.2
NetB31_3: B31.3 D31.0 | length 4.7
  Top Layer w0.5: D31.0 29.332,45.689 30.27,44.751 B31.3
NetB31_4: B31.4 B35.4 | length 15.9
  Top Layer w0.5: B31.4 33.851,49.251 34.827,50.227 34.827,60.387 33.938,61.276 32.379,61.276 B35.4
NetB32_1: B32.1 D32.0 | length 4.6
  Top Layer w0.5: B32.1 42.116,32.751 43.332,33.967 D32.0
NetB32_4: B32.4 B33.4 | length 15.7
  Top Layer w0.5: B33.4 33.727,25.251 34.7,26.224 34.7,36.511 33.96,37.251 B32.4
NetB33_2: B33.2 B34.2 | length 15.7
  Top Layer w0.5: B34.2 39.037,13.251 37.748,14.54 37.748,24.192 38.807,25.251 B33.2
NetB33_3: B33.3 D33.0 | length 4
  Top Layer w0.2: D33.0 31.582,20.751 B33.3
NetB34_1: B34.1 D34.0 | length 5.1
  Top Layer w0.5: B34.1 43.008,8.751 43.332,9.075 D34.0
NetB34_4: B34.4 Reg2.2 | length 74.1
  Top Layer w0.5: v1(4.036,13.668) 6.108,13.668 14.888,4.888 29.493,4.888 29.493,12.851 29.893,13.251 B34.4
  Bottom Layer w0.2: 35.208,11.278 Reg2.2
  Bottom Layer w0.5: v1(4.036,13.668) 6.426,11.278 35.208,11.278
NetB35_1: B35.1 D35.0 | length 4.8
  Top Layer w0.5: B35.1 42.494,56.751 43.329,57.586 D35.0
NetB41_2: B41.2 B42.2 | length 15.6
  Top Layer w0.5: B42.2 22.276,37.251 21.873,37.654 21.873,48.576 22.548,49.251 B41.2
NetB41_3: B41.3 D41.0 | length 5.3
  Top Layer w0.5: D41.0 12.999,44.782 13.03,44.751 B41.3
NetB41_4: B41.4 B45.4 | length 16
  Top Layer w0.5: B41.4 17.468,49.251 18.698,50.481 18.698,60.26 17.707,61.251 B45.4
NetB42_1: B42.1 D42.0 | length 4.6
  Top Layer w0.5: B42.1 25.887,32.751 26.999,33.863 D42.0
NetB42_4: B42.4 B43.4 | length 15.9
  Top Layer w0.5: B43.4 17.471,25.251 18.444,26.224 18.444,36.638 17.831,37.251 B42.4
NetB43_2: B43.2 B44.2 | length 15.1
  Top Layer w0.5: B44.2 22.781,13.251 21.873,14.159 21.873,24.319 22.805,25.251 B43.2
NetB43_3: B43.3 D43.0 | length 4
  Top Layer w0.2: D43.0 15.249,20.751 B43.3
NetB44_1: B44.1 D44.0 | length 5.1
  Top Layer w0.5: B44.1 26.752,8.751 26.999,8.998 D44.0
NetB44_4: B44.4 Reg2.3 | length 47.6
  Top Layer w0.5: v1(4.036,16.001) 6.315,16.001 9.065,13.251 B44.4
  Bottom Layer w0.2: 35.081,12.548 Reg2.3
  Bottom Layer w0.5: v1(4.036,16.001) 7.489,12.548 35.081,12.548
NetB45_1: B45.1 D45.0 | length 5.1
  Top Layer w0.5: B45.1 26.652,56.751 26.999,57.098 D45.0
NetBM_3: BM.3 R26.0 regIN.12 | length 106.3
  Top Layer w0.2: BM.3 73.957,66.751 ; 84.357,29.262 84.373,29.278
  Top Layer w0.5: 73.957,66.751 76.624,66.751 78.769,68.896 82.325,68.896 84.992,66.229 84.992,11.746 83.849,10.603 82.199,10.603 v1(82.141,10.661)
  Bottom Layer w0.2: 65.702,9.5 regIN.12@67.438,9.5
  Bottom Layer w0.5: 65.702,9.5 63.299,7.097 63.299,3.718 64.322,2.695 76.957,2.695 80.801,6.539 80.801,9.321 v1(82.141,10.661) R26.0
NetBN_3: BN.3 R25.0 regIN.13 | length 157.6
  Top Layer w0.2: 86.897,13.276 86.897,49.084
  Top Layer w0.5: BN.3@73.308,73.751 76.131,73.751 78.388,76.008 84.992,76.008 86.703,74.297 86.703,10.536 84.687,8.52 v1(82.141,8.52)
  Bottom Layer w0.2: 65.801,10.77 regIN.13@67.438,10.77
  Bottom Layer w0.5: 65.801,10.77 62.494,7.463 62.494,3.375 63.967,1.902 78.45,1.902 83.919,7.371 R25.0 v1(82.141,8.52)
NetD11_1: D11.1 D21.1 D31.1 D41.1 R22.0 regIN.4 | length 127.2
  Top Layer w0.2: D41.1 D41.1@13.025,50.401
  Top Layer w0.5: D41.1 12.983,50.385 12.983,49.592 15.015,47.56 18.444,47.56 22.762,51.878 26.318,51.878 27.795,50.401 D31.1 29.366,50.367 29.366,49.592 31.398,47.56 34.7,47.56 38.891,51.751 42.447,51.751 43.797,50.401 D21.1 45.666,49.548 47.4,47.814 51.337,47.814 55.147,51.624 59.084,51.624 60.307,50.401 D11.1 61.999,49.598 63.91,47.687 68.355,47.687 71.53,50.862 74.959,50.862 78.769,47.052 78.769,21.889 80.659,19.999 v1(82.141,19.999)
  Bottom Layer w0.2: regIN.4@74.238,10.77 75.664,10.77 ; 80.799,19.999 v1(82.141,19.999) R22.0
  Bottom Layer w0.5: 75.664,10.77 78.007,13.113 78.007,17.207 80.799,19.999
NetD12_1: D12.1 D22.1 D32.1 D42.1 R21.0 regIN.5 | length 99.5
  Top Layer w0.2: 80.702,18.051 v1(82.141,18.051)
  Top Layer w0.5: D42.1 28.731,38.401 30.016,39.686 34.065,39.686 38.383,35.368 41.177,35.368 43.303,37.494 43.303,38.401 43.525,38.18 45.02,38.18 46.272,39.432 50.702,39.432 54.385,35.749 57.814,35.749 59.666,37.601 D22.1 60.989,38.401 62.02,39.432 66.831,39.432 70.768,35.495 74.07,35.495 75.999,37.424 D12.1 ; 75.999,37.249 77.626,35.622 77.626,19.112 78.687,18.051 80.702,18.051
  Bottom Layer w0.2: regIN.5@74.238,9.5 75.634,9.5 ; 81.01,18.051 v1(82.141,18.051) R21.0
  Bottom Layer w0.5: 75.634,9.5 78.769,12.635 78.769,15.81 81.01,18.051
NetD13_1: D13.1 D23.1 D33.1 D43.1 R20.0 regIN.6 | length 106.7
  Top Layer w0.2: D43.1 D43.1@13.025,26.401
  Top Layer w0.5: D43.1 12.999,25.351 14.793,23.557 18.571,23.557 22.127,27.113 26.368,27.113 27.08,26.401 D33.1 29.332,25.623 31.398,23.557 33.557,23.557 37.367,27.367 40.923,27.367 41.889,26.401 D23.1 45.666,25.291 47.527,23.43 50.702,23.43 54.766,27.494 58.703,27.494 59.796,26.401 D13.1 61.999,25.468 63.91,23.557 67.466,23.557 71.149,27.24 73.816,27.24 75.086,25.97 75.086,19.239 78.221,16.104 v1(82.141,16.104)
  Bottom Layer w0.2: regIN.6@74.238,8.23 75.634,8.23 ; 80.841,16.104 v1(82.141,16.104)
  Bottom Layer w0.5: 75.634,8.23 79.785,12.381 79.785,15.048 80.841,16.104 ; v1(82.141,16.104) R20.0
NetD14_1: D14.1 D24.1 D34.1 D44.1 R19.0 regIN.11 | length 101.1
  Top Layer w0.2: D24.1@59.643,14.401 D24.1 ; D14.1@75.973,14.401 D14.1
  Top Layer w0.5: D44.1 28.719,14.401 30.128,15.81 33.684,15.81 38.256,11.238 41.177,11.238 43.332,13.393 D34.1 45.495,14.401 46.777,15.683 49.305,15.683 54.004,10.984 57.179,10.984 59.643,13.448 D24.1@59.643,14.401 ; D24.1 60.989,14.401 62.271,15.683 66.577,15.683 71.022,11.238 73.816,11.238 75.975,13.397 75.973,13.399 D14.1@75.973,14.401 ; D14.1 79.399,14.401 80.998,12.802 v1(82.141,12.802)
  Bottom Layer w0.2: 65.855,8.23 regIN.11@67.438,8.23 ; v1@82.141,12.578 v1(82.141,12.802)
  Bottom Layer w0.5: 65.855,8.23 64.034,6.409 64.034,4.362 64.84,3.556 76.197,3.556 79.855,7.214 79.855,10.038 82.141,12.324 v1@82.141,12.578 ; v1(82.141,12.802) R19.0
NetD15_1: D15.1 D25.1 D35.1 D45.1 R23.0 regIN.3 | length 119.4
  Top Layer w0.5: D45.1 27.951,62.401 28.477,62.927 41.812,62.927 42.338,62.401 D35.1 44.207,62.401 44.733,62.927 58.068,62.927 58.594,62.401 D25.1 59.687,62.419 60.735,62.419 61.243,62.927 73.943,62.927 74.469,62.401 D15.1 75.975,62.377 75.975,61.53 73.435,58.99 71.911,58.99 70.138,57.217 70.138,54.921 72.546,52.513 77.626,52.513 80.039,50.1 80.039,22.651 80.744,21.946 v1(82.141,21.946)
  Bottom Layer w0.2: regIN.3@74.238,12.04 75.634,12.04 ; 80.841,21.946 v1(82.141,21.946) R23.0
  Bottom Layer w0.5: 75.634,12.04 77.245,13.651 77.245,18.35 80.841,21.946
NetD120_0: D120.0 U1.2 U1.4 | length 8.5
  Bottom Layer w0.5: U1.2 U1.4
  Bottom Layer w0.8: U1.4@81.944,51.432 D120.0
NetPOWER_1: POWER.1 U1.3 С7.2 | length 7.6
  Bottom Layer w0.5: С7.2 82.202,40.676 POWER.1 ; 79.474,42.861 79.714,43.101 U1.3
  Bottom Layer w0.8: С7.2 79.474,42.861
NetR12_0: R12.0 Reg2.10 | length 9.9
  Bottom Layer w0.2: 40.366,17.628 Reg2.10
  Bottom Layer w0.5: R12.0 39.066,20.041 40.002,19.105 40.002,17.992 40.366,17.628
NetR27_1: R27.1 regIN.15 | length 3.8
  Bottom Layer w0.2: R27.1@63.656,13.31 regIN.15@67.438,13.31
NetR28_1: R28.1 regIN.10 | length 23.3
  Bottom Layer w0.2: 65.759,6.96 regIN.10@67.438,6.96
  Bottom Layer w0.5: 65.759,6.96 64.769,5.97 64.769,4.959 65.348,4.38 70.133,4.38 72.299,6.546 R28.1
pads on no net: ATMega328p.19 ATMega328p.22 ATMega328p.23 ATMega328p.24 ATMega328p.25 ATMega328p.26 ATMega328p.27 ATMega328p.28 B11.1 B12.3 B13.1 B14.3 B15.2 B15.3 B21.1 B22.3 B23.1 B24.3 B25.2 B25.3 B31.1 B32.3 B33.1 B34.3 B35.2 B35.3 B41.1 B42.3 B43.1 B44.3 B45.2 B45.3 BM.1 BM.2 BN.1 BN.2 NewLCD.7 NewLCD.8 NewLCD.9 NewLCD.10 Reg2.4 Reg2.5 Reg2.6 Reg2.7 Reg2.9 regIN.7 regIN.14 USB1. USB1.2 USB1.3

## Polygon pours and split planes (outlines as drawn)
no net on Internal Plane 1 (split plane): 88.489,0.511 0.509,0.511 0.509,123.036 88.489,123.036
no net on Internal Plane 2 (split plane): 88.489,0.511 0.509,0.511 0.509,123.036 88.489,123.036

## Keep-outs
Keep-Out Layer:
  lines w0.254: 0.456,0.456 0.456,123.094 ; 88.55,0.452 88.55,123.09
  lines w0.3: 0.45,0.45 88.55,0.452 ; 0.456,123.094 88.545,123.095

## Silkscreen, mask and mechanical layers (free items; w line width, h text height)
Mechanical 1:
  lines w0.1: -0.001,0.001 -0.001,123.546 88.999,123.546 88.999,0.001 -0.001,0.001
Drill Drawing:
  text ".LEGEND" at 94.079,5.081 h1.52
  text "Drill Drawing." at 94.079,2.541 h1.52